# Altium PCB LD-Shoushi-V1.7.pcbdoc
Units mil, origin at the board's own origin, x right, y up, seen from the top; angles counter-clockwise.
Board outline 1576.8 x 1131.4 mil, 2 copper layers (Top Layer, Bottom Layer), stack 39.335 mil thick; 53 components, 37 nets, 241 pads, 35 vias.
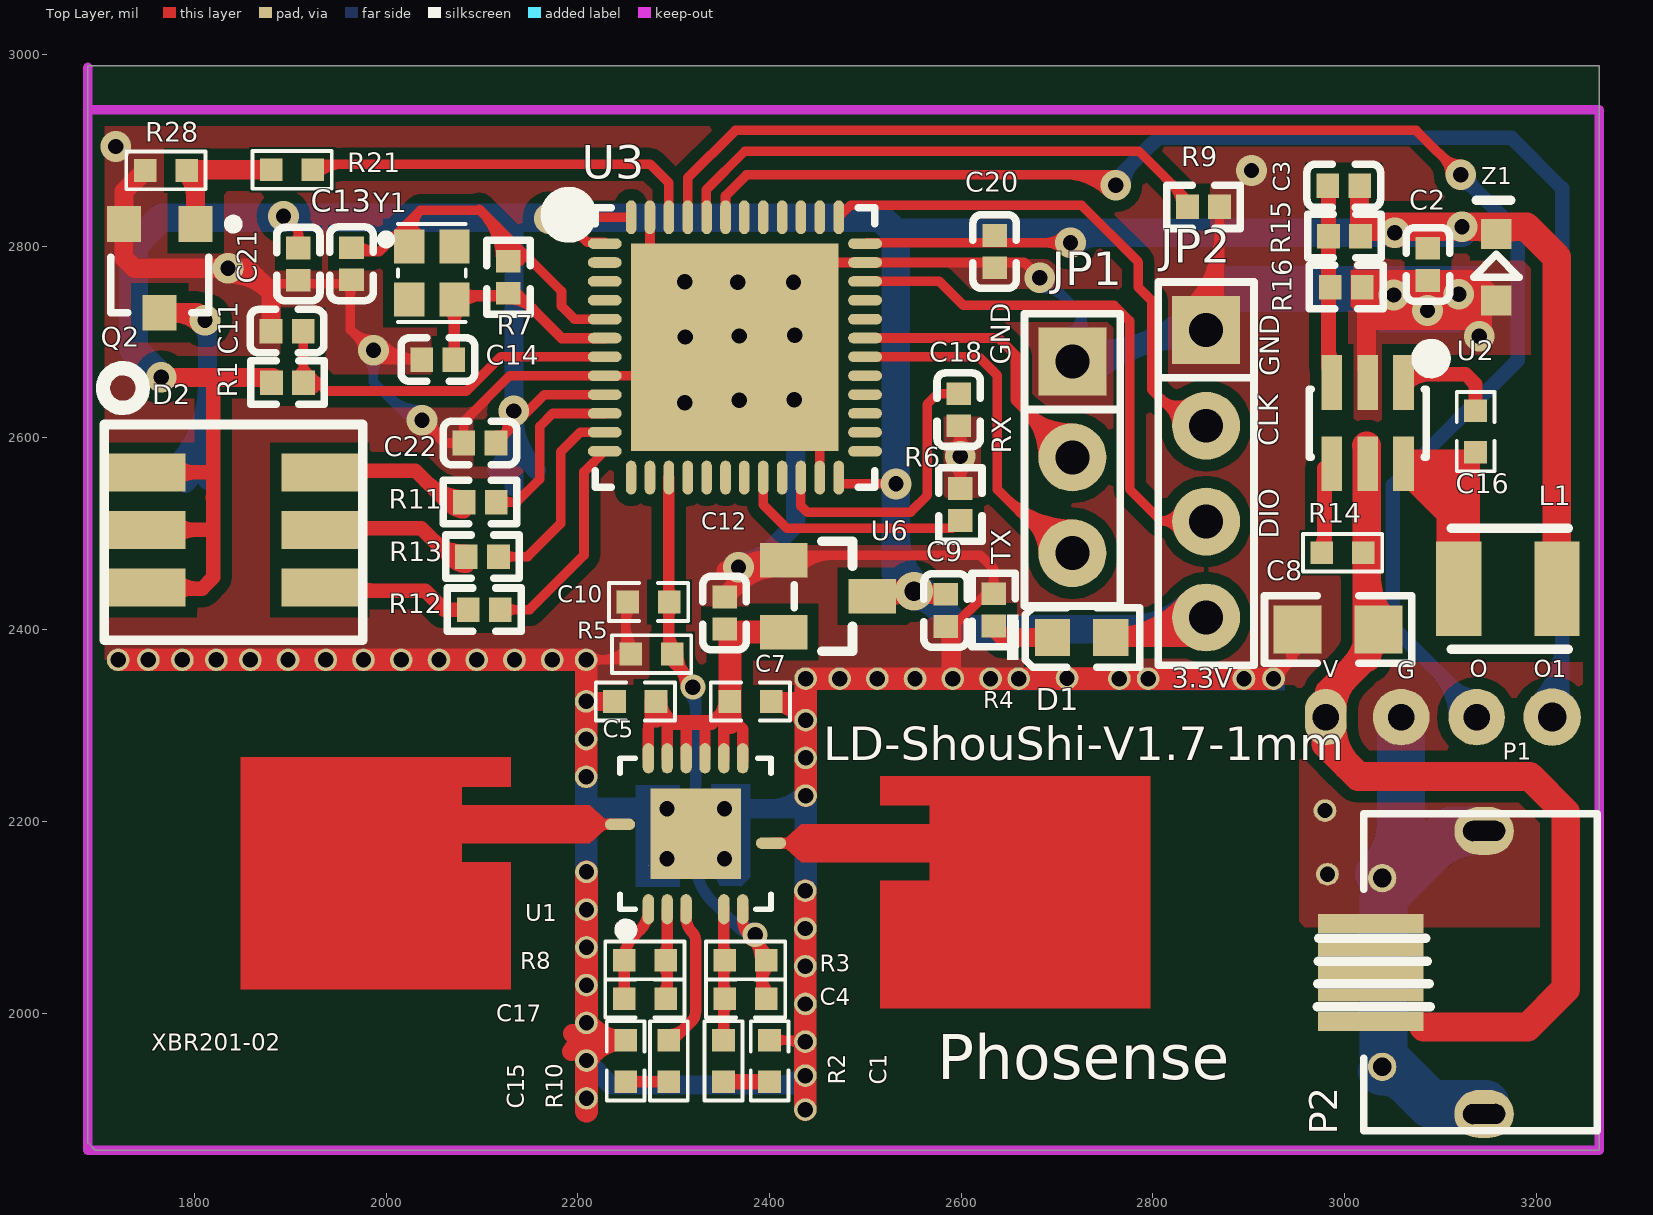
[diagram p0: Top Layer view]
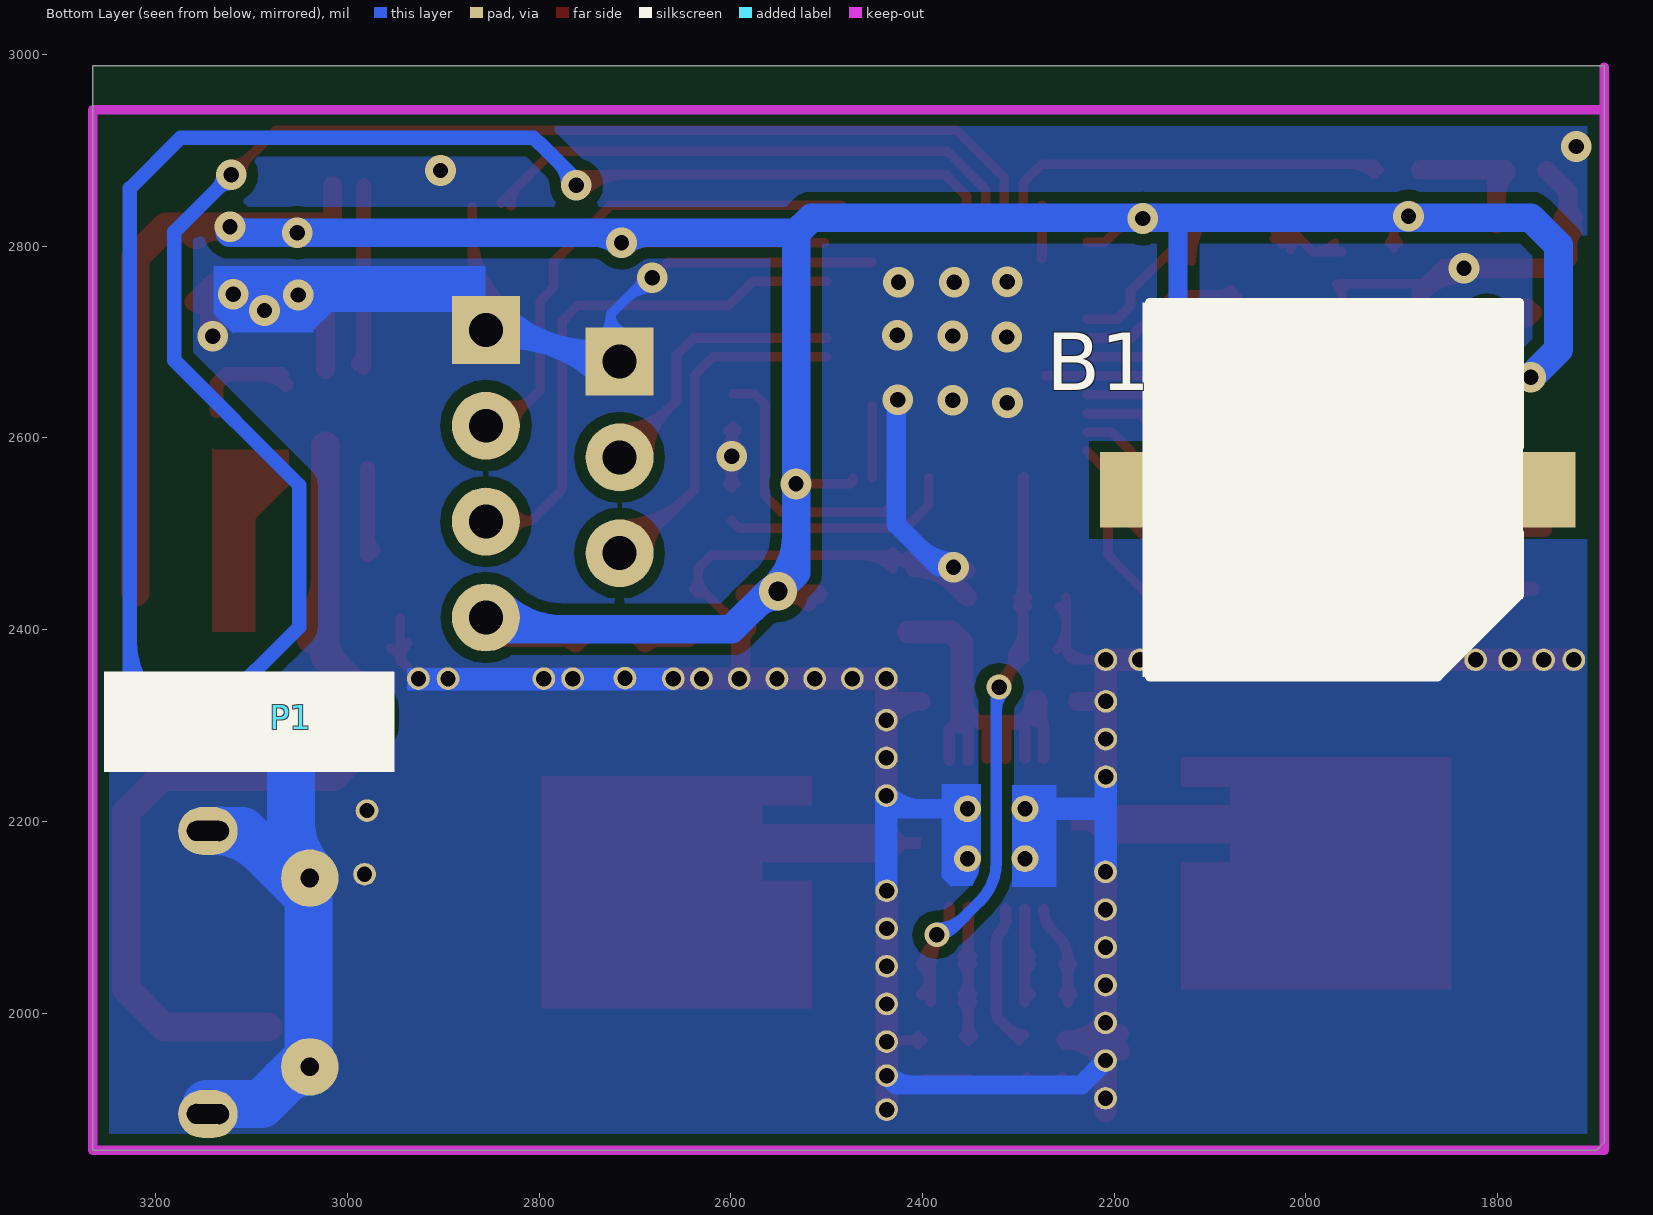
[diagram p1: Bottom Layer view, seen from below]

## Layer stack, top to bottom
Top Layer: signal copper 1.4
Dielectric: core 36.5354, FR-4, Dk 4.8
Bottom Layer: signal copper 1.4

## Board outline
1688.9,2988.1 3265.7,2988.1 3265.7,1856.7 1697.1,1856.7 1688.9,1864.9 1688.9,2986.8

## Design rules (kind name [scope] priority, off if disabled: settings)
Clearance [All] p1: gap=7
ComponentClearance [All] p1: gap=10 collisioncheckmode=3 verticalgap=10
PolygonConnect [All] p1: connectstyle=Direct reliefconductorwidth=10 reliefentries=4 polygonreliefangle="90 Angle"
RoutingVias [All] p1: holewidth=28 width=50 viastyle="Through Hole" minholewidth=15 minwidth=30 maxholewidth=28 maxwidth=50
SolderMaskExpansion [All] p1: expansion=4
TestPointUsage FabricationTestPointUsage [All] p1: valid=0 allowmultiple=FALSE
Testpoint FabricationTestpoint [(IsPad And (OnTopLayer Or OnBottomLayer))] p1: side=3 testpointundercomponent=TRUE minsize=40 maxsize=100 preferedsize=60 minholesize=0 maxholesize=40 preferedholesize=32 testpointgrid=1 style=297 order=0-112345678
Width [All] p1: maxlimit=60 minlimit=10 preferedwidth=10
18 further rules are at their usual default settings.

## Components (designator, comment, footprint, x,y, rotation, side; value= is the part's Value field where it differs from the comment)
B1 "BEEP-C255327" C255327-Beep 1777.7,2545.9 r0 bottom
C1 "4.7uF" C0402 2400,1950 r90 top
C2 "10uF" LC-0402_C#1 3086.9,2781 r90 top (schematic designator C18)
C3 "22pF" LC-0402_C#1 2999.1,2863 r0 top (schematic designator C16)
C4 "1nF" C0402 2375,2015 r180 top
C5 "0.5pF" C0402 2260,2325 r180 top
C7 "100nF" C0402 2380,2325 r0 top (schematic designator C5)
C8 "10uF/16V" C0805 2993.2,2400.1 r180 top
C9 "10uF" LC-0402_C#1 2583.7,2420 r90 top
C10 "100nF" C0402 2273.9,2428.8 r180 top (schematic designator C20)
C11 "100nF" LC-0402_C#1 1896.7,2711.4 r0 top
C12 "10uF" LC-0402_C#1 2353.1,2417.3 r270 top
C13 "22pF" LC-0402_C#1 1963.9,2781.7 r90 top
C14 "22pF" LC-0402_C#1 2054,2681.7 r0 top
C15 "1nF" C0402 2250,1950 r270 top
C16 "100nF" C0402 3136.6,2606.6 r90 top
C17 "1nF" C0402 2270,2015 r180 top
C18 "2.2UF" LC-0402_C#1 2597.4,2629.4 r270 top
C20 "10uF/6.3V" LC-0402_C#2 2634.9,2794.4 r90 top
C21 "0.1uF/50V" LC-0402_C#2 1908.4,2781.4 r90 top
C22 "0.1uF/50V" LC-0402_C#2 2097.9,2594.7 r0 top
D1 "红灯" LC-0603_LED_S1 2725.7,2391.9 r0 top
D2 "led三色共阴极灯" 三色灯 1845.8,2509 r0 top
JP1 "PH2.0-3P" 1X3-2.54 2716,2679.7 r270 top
JP2 "SWD" SIP4-2.54 2933.5,2791.7 r270 top
L1 "CSME0315D-100M-LRH" PRS3015 3115.2,2442.6 r0 top
P1 "PH2.0-3P" PH2.0-3P 2980.3,2308.7 r0 bottom
P2 "MINIUSB" miniusb 3027.4,2042.3 r0 top
Q2 "8050" SOT-23#1 1763.8,2781.8 r180 top
R1 "4.7KΩ" LC-0402_R 1897.1,2657.7 r180 top
R2 "2k" R0402 2352,1950 r90 top
R3 "1M" R0402 2375,2055 r180 top
R4 "1KΩ" LC-0402_R 2633.9,2420.5 r270 top (schematic designator R15)
R5 "47k" R0402 2276.9,2374.5 r180 top
R6 "10KΩ" LC-0402_R 2599.03,2530.53 r270 top
R7 "10MΩ" LC-0402_R 2127.6,2767.6 r270 top
R8 "10k" R0402 2270,2055 r180 top
R9 "10KΩ" LC-0402_R 2852.8,2841.1 r180 top
R10 "10k" R0402 2295,1950 r270 top
R11 "200Ω" LC-0402_R 2098.11,2533.06 r0 top (schematic designator R7)
R12 "200Ω" LC-0402_R 2102.41,2420.76 r0 top (schematic designator R7)
R13 "200Ω" LC-0402_R 2100.51,2476.06 r0 top (schematic designator R7)
R14 "47k" R0402 2997.9,2480.2 r0 top
R15 "100KΩ" LC-0402_R 2999.9,2810.6 r0 top
R16 "22.1KΩ" LC-0402_R 3001.7,2757.3 r0 top
R21 "2K" R0402 1902,2879.7 r180 top
R28 "2K" R0402 1770.3,2879 r0 top
U1 "XBR816" QFN24-1 2322.83,2187.01 r90 top
U2 "SY8120B1ABC" SOT23-6 3024.1,2615.5 r0 top
U3 "STM32F401CCU6" UFQFPN-48_L7.0-W7.0-P0.50-BL-EP 2363.9,2694.4 r270 top
U6 "ME6216A12M3G" SOT-23#2 2414.8,2472.2 r180 top
Y1 "25MHZ" OSC-SMD_4P-L2.0-W1.6-BL 2047.7,2772.1 r270 top
Z1 "ESD5Z5.0T1G" SOD323 3158.3,2824.6 r270 top

## Footprints (in the part's own frame and the unit in brackets; to place one, negate y for a bottom-side part, rotate by r counter-clockwise, add the part's x,y. Pads: shape width x height; smd on the part's side, far side on the other; paste and mask are expansions set on the pad)
1X3-2.54 [mm] "1X3-2.54"
  rect 1.8x1.8 hole 0.9: 1(0,0)
  round 1.8 hole 0.9: 2(2.54,0) 3(5.08,0)
  silkscreen extent -1.27,-1.27 6.48,1.27
C0402 [mm]
  rect 0.6x0.6 smd: 1(-0.55,0) 2(0.55,0)
  silkscreen extent -1.05,-0.5 1.05,0.5, body extent -0.5,-0.3 0.5,0.3, height 0.2
C0805 [mil]
  rect 50x50 smd: 1(-42.28,0) 2(42.28,0)
  silkscreen extent -77,-35 77,35, body extent -39,-24 39,24, height 47
C255327-Beep [mm] "C255327-Beep"
  rect 3x2 smd: 1(9.6,0) 2(0,0)
  silkscreen extent 0,-4.95 9.78,4.95
LC-0402_C#1 [mm]
  rect 0.6x0.65 smd mask+0.051: 1(-0.425,0) 2(0.425,0)
  silkscreen extent -0.97,-0.58 0.97,0.58, body extent -0.48,-0.3 0.52,0.3, height 0.2
LC-0402_C#2 [mm]
  rect 0.6x0.65 smd: 1(-0.425,0) 2(0.425,0)
  silkscreen extent -0.97,-0.58 0.97,0.58, body extent -0.48,-0.3 0.52,0.3, height 0.2
LC-0402_R [mm]
  rect 0.6x0.65 smd mask+0.051: 1(-0.425,0) 2(0.425,0)
  silkscreen extent -0.97,-0.58 0.97,0.58, body extent -0.57,-0.27 0.58,0.28, height 0.41
LC-0603_LED_S1 [mm]
  rect 0.93x0.98 smd: A(0.77,0) K(-0.77,0)
  silkscreen extent -1.97,-0.79 1.54,0.79, body extent -0.8,-0.4 0.8,0.4, height 0.6
miniusb [mm]
  rect 2.8x0.508 smd: 1(0,-1.295) 5(0,1.295)
  rect 2.8x0.35 smd: 2(0,-0.6) 3(0,0) 4(0,0.6)
  round 0.75 / inner round 0.75 / far side round 1.524 hole 0.5: 6(0.3,2.5) 9(0.3,-2.5)
  oval 1.575x1.27 hole 0.533 slot 1.118 at 0.5 deg: 7(3,3.75) 8(3,-3.75)
  silkscreen extent -0.19,-4.2 6,4.2
OSC-SMD_4P-L2.0-W1.6-BL [mm]
  rect 0.9x0.8 smd: 1(-0.7,-0.6) 2(0.7,-0.6) 3(0.7,0.6) 4(-0.7,0.6)
  silkscreen extent -1.3,-1.37 1.3,0.9
PH2.0-3P [mm]
  oval 1.1x1.5 hole 0.7: 1(0,0)
  round 1.5 hole 0.7: 2(2,0) 3(4,0)
  body extent -0.25,-0.25 4.25,0.25, height 5.5
PRS3015 [mm]
  rect 1.2x2.5 smd: 1(0.1,0) 2(2.7,0)
  silkscreen extent -0.1,-1.6 3,1.6, body extent -0.1,-1.5 2.9,1.5, height 1.5
QFN24-1 [mm] "QFN24"
  oval 0.8x0.3 smd: 1(-2,1.25) 2(-2,0.75) 3(-2,0.25) 5(-2,-0.75) 6(-2,-1.25) 13(2,-1.25) 14(2,-0.75) 15(2,-0.25) 16(2,0.25) 17(2,0.75) 18(2,1.25)
  oval 0.3x0.8 smd: 9(-0.25,-2) 21(0.25,2)
  rect 2.4x2.4 smd: 25(0,0)
  silkscreen extent -2.7,-2 2,2, body extent -2,-2 2,2, height 1
R0402 [mm]
  rect 0.6x0.6 smd: 1(-0.55,0) 2(0.55,0)
  silkscreen extent -1.05,-0.5 1.05,0.5, body extent -0.49,-0.25 0.51,0.25, height 0.35
SIP4-2.54 [mm]
  rect 1.8x1.8 hole 0.9: 1(2.007,-1.981)
  round 1.8 hole 0.9: 2(4.547,-1.981) 3(7.087,-1.981) 4(9.627,-1.981)
  silkscreen extent 0.74,-3.25 10.9,-0.71
SOD323 [mm]
  rect 0.8x0.8 smd: A(2.06,0) K(0.3,0)
  silkscreen extent 0.84,-0.6 1.44,0.6, body extent -0.17,-0.62 2.53,0.63, height 1.1
SOT23-6 [mm] "SOT-23/SC-74A; 5 Leads; Body 3.1 x 3 mm, inc. leads (LxW max)"
  rect 0.55x1.45 smd: 1(0.95,1.075) 2(0,1.075) 3(-0.95,1.075) 4(-0.95,-1.075) 5(0,-1.075) 6(0.95,-1.075)
  silkscreen extent -1.55,-0.9 1.7,1.8, body extent -1.4,-1.19 1.4,1.23, height 1.08
SOT-23#1 [mm]
  rect 0.9x0.95 smd: 1(-0.95,-1.048) 2(0.95,-1.048) 3(0,1.302)
  silkscreen extent -2.07,-1.17 1.3,1.3
SOT-23#2 [mm]
  rect 1.25x0.914 smd: 1(0,0) 2(0,1.9) 3(-2.348,0.95)
  silkscreen extent -1.82,-0.51 -0.27,2.41, body extent -2.67,-0.55 0.33,2.45, height 1.3
UFQFPN-48_L7.0-W7.0-P0.50-BL-EP [mm]
  oval 0.28x0.896 smd: 1(-2.751,-3.449) 2(-2.25,-3.449) 3(-1.75,-3.449) 4(-1.25,-3.449) 5(-0.749,-3.449) 6(-0.249,-3.449) 7(0.249,-3.449) 8(0.749,-3.449) 9(1.25,-3.449) 10(1.75,-3.449) 11(2.25,-3.449) 12(2.751,-3.449) 25(2.751,3.449) 26(2.25,3.449) 27(1.75,3.449) 28(1.25,3.449) 29(0.749,3.449) 30(0.249,3.449) 31(-0.249,3.449) 32(-0.749,3.449) 33(-1.25,3.449) 34(-1.75,3.449) 35(-2.25,3.449) 36(-2.751,3.449)
  oval 0.896x0.28 smd: 13(3.449,-2.751) 14(3.449,-2.25) 15(3.449,-1.75) 16(3.449,-1.25) 17(3.449,-0.749) 18(3.449,-0.249) 19(3.449,0.249) 20(3.449,0.749) 21(3.449,1.25) 22(3.449,1.75) 23(3.449,2.25) 24(3.449,2.751) 37(-3.449,2.751) 38(-3.449,2.25) 39(-3.449,1.75) 40(-3.449,1.25) 41(-3.449,0.749) 42(-3.449,0.249) 43(-3.449,-0.249) 44(-3.449,-0.749) 45(-3.449,-1.25) 46(-3.449,-1.75) 47(-3.449,-2.25) 48(-3.449,-2.751)
  rect 5.5x5.5 smd: 49(0,0)
  silkscreen extent -3.7,-4.5 3.7,3.7
三色灯 [mil]
  rect 80x39.37 smd: 1(-95,55) 2(-95,-5) 3(-95,-65) 4(85,55) 5(85,-5) 6(85,-65)
  silkscreen extent -140,-120 130,105

## Part data
B1: library part BEEP
C1 C4 C5 C7 C8 C10 C15 C16 C17: library part Cap, "Capacitor"
C2 C9 C12 C20 C21 C22: library part "0402 10uF (106) 20% 6.3V", "贴片电容"
C3 C13 C14: library part "0402 22pF (220) 5% 50V", "贴片电容"
C11: library part "0402 100nF (104) 10% 16V", "贴片电容"
C18: library part "0402 2.2nF (222) 10% 50V", "贴片电容"
D1: library part "0603 红灯", "发光二极管"
JP1 P1: library part "Header 3", "Header, 3-Pin"
JP2: library part "Header 4", "4P接插件"
L1: library part Inductor, "Inductor"
P2: library part MINIUSB-M
Q2: library part 2N3904, "NPN General Purpose Amplifier"
R1: library part "0402 4.7KΩ (4701) 1%", "贴片电阻"
R2 R3 R5 R8 R10 R14 R21 R28: library part Res2, "Resistor"
R4: library part "0402 1KΩ (1001) 1%", "贴片电阻"
R6 R9: library part "0402 10KΩ (1002) 1%", "贴片电阻"
R7: library part "0402 10MΩ (1005) 1%", "贴片电阻"
R11 R12 R13: library part "0402 200Ω (2000) 1%", "贴片电阻"
R15: library part "0402 100KΩ (1003) 1%", "贴片电阻"
R16: library part "0402 22KΩ (2202) 1%", "贴片电阻"
U1: library part XBR1000_24_1
U2: library part H9108
U3: "ARM Cortex-M4 32-bit MCU+FPU, 105 DMIPS, 256 kB Flash, 64 kB Internal RAM, 36 I/Os, 48-pin UFQFPN, -40 to 85 degC, Tray"
U6: library part SSP6206
Y1: library part "SMD-3225_4P  25MHZ 12PF 10PPM", "贴片晶振"
Z1: library part "D Zener", "Zener Diode"

## Free pads (board coordinates)
  round 23.62 hole 16: 1(1720.47,2368.5) 1(1752.01,2368.5) 1(1787.44,2368.5) 1(1822.89,2368.5) 1(1858.32,2368.5) 1(1897.69,2368.5) 1(1937.06,2368.5) 1(1976.43,2368.5) 1(2015.8,2368.5) 1(2055.17,2368.5) 1(2094.54,2368.5) 1(2133.91,2368.5) 1(2173.28,2368.5) 1(2208.72,2246.46) 1(2208.72,2285.83) 1(2208.72,2325.2) 1(2208.72,2368.5) 1(2209.03,1911.02) 1(2209.03,1950.39) 1(2209.03,1989.76) 1(2209.03,2029.13) 1(2209.03,2068.5) 1(2209.03,2107.87) 1(2209.03,2147.24) 1(2437.38,1899.21) 1(2437.38,1934.65) 1(2437.38,1970.08) 1(2437.38,2009.45) 1(2437.38,2048.82) 1(2437.38,2088.19) 1(2437.38,2127.56) 1(2437.69,2348.82) 1(2437.69,2226.77) 1(2437.69,2266.14) 1(2437.69,2305.51) 1(2473.12,2348.81) 1(2512.49,2348.81) 1(2551.86,2348.81) 1(2591.23,2348.81) 1(2630.6,2348.81) 1(2660,2348.82) 1(2710.4,2349.4) 1(2765,2348.82) 1(2795,2348.82) 1(2895,2348.82) 1(2925.88,2348.82) 1(2979.5,2211.2) 1(2982.1,2144.8)
  round 28 hole 16: 1(2293.04,2161.03) 1(2293.04,2213.03) 1(2353,2161.03) 1(2353,2213.03)
  round 60 hole 30: 1(3216.52,2308.7)

## Via types
v1: diameter 32, hole 16, Top Layer to Bottom Layer, 32 vias
v2: diameter 26, hole 16, Top Layer to Bottom Layer, tented both sides, 2 vias
v3: diameter 40, hole 20, Top Layer to Bottom Layer, 1 vias

## Nets (pads, with @x,y where several pads share a name; then routed paths per layer and width w, separated by ;. In a path a pad name is that pad's centre, name@x,y a point inside that pad or via, vN(x,y) a via of type N, cw(c..) or ccw(c..) an arc to the next point about the centre after c; other vN are vias at no path point)
1.2V: C5.1 C7.1 C12.2 U1.13 U1.14 U1.15 U1.16 U1.17 U1.18 U6.2 | length 559.3
  Top Layer w11.8: U1.18 2273.62,2295.19 cw(c2318.11,2295.19) 2274.32,2303.03 cw(c2318.11,2295.19) 2281.65,2320.69 cw(c2318.11,2295.19) 2281.94,2321.09 cw(c2318.11,2295.19) C5.1@2286.65,2326.65 ; C5.1@2281.65,2321.38 2300,2303.03 2293.31,2303.03 U1.17 ; C5.1@2287.56,2325 ccw(c2310.58,2325) 2294.31,2308.73 ; U1.16 2312.99,2303.03 ; U1.15 2332.68,2303.03 ; 2339.38,2303.03 C7.1@2357.44,2321.09 ; 2346.13,2309.79 ccw(c2330.92,2325) C7.1@2352.44,2325 ; U1.14@2352.36,2263.39 2352.36,2303.03 ; 2365.32,2303.03 2372.05,2296.3 U1.13@2372.05,2263.39
  Top Layer w15.75: 2300,2303.03 2339.38,2303.03 ; 2352.36,2303.03 2362.2,2303.03
  Top Layer w24: 2281.65,2310 C5.1@2281.65,2324.79 ; 2358.6,2303.03 2358.6,2385.8 2370.2,2397.4 U6.2
3.3V: B1.1 C2.2 C3.2 C9.2 C20.2 C21.2 C22.2 D1.A D2.1 D2.2 D2.3 JP2.4 L1.2 R1.2 R15.2 U3.1 U3.9 U3.24 U3.36 U3.48 U6.3 Z1.K | length 5448.4
  Top Layer w10: v1(1892.9,2831.3) 1908.4,2815.8 C21.2 ; C21.2@1903.58,2802.95 ccw(c1891.96,2814.58) 1908.4,2814.58 ccw(c1924.84,2814.58) C21.2@1913.22,2802.95 ; C22.2 2165.13,2645.2 U3.9 ; C22.2@2114.63,2602.5 ccw(c2114.63,2621.31) 2127.94,2608.01 ; C22.2@2121.44,2595.68 cw(c2135.51,2595.68) C22.2@2125.56,2605.63 ; C22.2@2121.95,2602.02 ccw(c2110.64,2613.33) v1@2124.07,2622.02 ; 2130.69,2610.76 ccw(c2121.25,2620.2) v1@2132.46,2627.46 ; v1@2170.2,2827.9 cw(c2170.2,2789.76) 2197.17,2816.73 ; v1(2170.2,2828.9) 2185,2828.9 2209.9,2804 U3.1@2228.1,2804 ; v1@2171.5,2830.2 U3.48 ; v1@2177.98,2821.12 cw(c2199.89,2799.21) 2199.89,2830.2 ; v1@2177.98,2836.68 ccw(c2193.62,2852.32) 2193.62,2830.2 ; U3.24 2472.2,2554.4 2474.6,2552 v1(2532,2552) ; U3.36@2502,2803.7 v1(2714,2803.7) ; v1@2706.22,2795.92 ccw(c2687.44,2777.14) 2687.44,2803.7 ccw(c2687.44,2830.26) v1@2706.22,2811.48
  Top Layer w15: D2.2 1814.8,2504 ; D2.1 1817.1,2564 ; D2.3@1764,2442.7 1808,2442.7 1819.8,2454.5 1819.8,2663.1 ; D2.3@1779.73,2435.38 cw(c1797.39,2417.72) 1797.39,2442.7 ; D2.3@1779.73,2452.62 ccw(c1803.67,2476.56) 1803.67,2442.7 ; D2.2@1779.73,2495.38 cw(c1800.53,2474.58) 1800.53,2504 cw(c1800.53,2533.42) D2.2@1779.73,2512.62 ; D2.1@1779.73,2555.38 cw(c1800.53,2534.58) 1800.53,2564 cw(c1800.53,2593.42) D2.1@1779.73,2572.62 ; 1819.2,2537.8 1819.8,2538.4
  Top Layer w20: v1@1765.5,2663.1 R1.2@1881.87,2663.1 ; 1865.34,2663.1 cw(c1865.34,2643.65) R1.2@1879.09,2657.4 ; U6.3@2509.26,2436.83 C9.2@2585.3,2436.83 ; U6.3@2519.01,2436.83 ccw(c2519.01,2471.79) v3@2543.73,2447.07 ; U6.3@2519.49,2429.14 cw(c2538.06,2410.57) v3@2538.06,2436.83 ; D1.A@2761.89,2386.03 cw(c2776.07,2371.84) 2776.07,2391.9 cw(c2776.07,2411.96) D1.A@2761.89,2397.77 ; 2799.05,2391.9 ccw(c2799.05,2460.31) JP2.4@2851.35,2416.2 ; JP2.4@2834.7,2391.9 D1.A ccw(c2756.02,2496.61) JP2.4@2836.06,2429.1 ; R15.2@3015.53,2813.4 C3.2@3015.53,2863
  Top Layer w30: R15.2@3023.9,2820.2 3189.5,2820.2 3221.2,2788.5 L1.2@3221.2,2439.1 ; 3034.92,2820.2 cw(c3034.92,2796.62) v1@3051.59,2813.29 ; v1@3053.01,2813.29 cw(c3069.68,2796.62) 3069.68,2820.2 ; 3138.6,2820.2 cw(c3138.6,2793.09) Z1.K@3157.77,2812.26 ; Z1.K@3158.83,2812.26 cw(c3178,2793.09) 3178,2820.2
  Bottom Layer w20: B1.1@2115.2,2566.67 ccw(c2071.5,2610.37) 2133.3,2610.37 ; B1.1@2133.3,2549 2133.3,2830.2 ; v1@2133.3,2623.25 ccw(c2213.31,2623.25) B1.1@2156.74,2566.67
  Bottom Layer w30: v1@1763.8,2664.9 1736.5,2692.2 1736.5,2801 1765.3,2829.8 2515.8,2829.8 2531.6,2814 ; 2531.6,2498.42 ccw(c2609.22,2498.42) v3@2554.34,2443.54 ; v1@2531.6,2545.8 v1(2532,2552) ; v3@2550.8,2435 cw(c2550.8,2401.68) 2574.36,2425.24 ; 2686.72,2814 cw(c2686.72,2776.42) v1@2713.29,2802.99 ; v1@2714.71,2802.99 cw(c2741.28,2776.42) 2741.28,2814 ; 2776.23,2400.3 ccw(c2776.23,2491.97) JP2.4@2841.05,2427.15 ; JP2.4 2843.1,2400.3 2599.3,2400.3 2559.6,2440 v3(2550.8,2440) 2531.6,2459.2 2531.6,2814 ; 3105.02,2814 ccw(c3105.02,2837.58) v1@3121.69,2820.91 ; v1@3122.4,2814 2531.6,2814
  other v1: 2133.3,2628 1765.3,2663.3 3052.3,2814 3122.4,2820.2
5~16V: C8.1 P1.1 P2.1 R14.2 U2.5 | length 1180.4
  Top Layer w30: P1.1 2980.3,2280.7 3014.2,2246.8 3193,2246.8 3230.6,2209.2 3230.6,2025.1 3190.9,1985.4 P2.1@3082.5,1985.4 ; P1.1@2984.3,2297.1 2984.3,2334.6 3023,2373.3 3023,2591.8 U2.5@3022.9,2591.9 ; P1.1@2986.95,2300.58 ccw(c3045.72,2298.45) 3004.13,2256.87 ; P1.1@2986.95,2316.57 cw(c3036.88,2316.57) 3001.58,2351.88 ; 3008.28,2358.58 ccw(c2966.75,2400.1) C8.1@3025.48,2400.1 ; 3023,2370.54 cw(c3043.68,2370.54) C8.1@3038.15,2390.46 ; 3023,2454.36 ccw(c3089.74,2454.36) C8.1@3042.55,2407.17
AD: C4.1 C10.1 R3.1 R5.1 U1.6 U3.15 | length 893.5
  Top Layer w11.8: C10.1@2291.37,2424.62 cw(c2282.62,2415.87) 2295,2415.87 ; C10.1@2291.37,2432.98 ccw(c2282.62,2441.73) 2295,2441.73 ; 2295,2397.35 ccw(c2321.4,2397.35) R5.1@2302.73,2378.68 ; 2295,2413.19 cw(c2311.16,2413.19) C10.1@2299.73,2424.62 ; 2295,2444.41 ccw(c2311.16,2444.41) C10.1@2299.73,2432.98 ; U3.15 2295,2370.1 v2@2320,2345.1 ; 2304.27,2360.83 cw(c2283.45,2340) v2@2312.9,2340 ; R5.1@2304.46,2374.5 ccw(c2337.94,2374.5) v2@2314.27,2350.83 ; U1.6@2372.05,2094.03 U1.6@2372.05,2110.24 ; U1.6 2372.05,2096.02 ccw(c2392.37,2096.02) 2378,2081.65 2392.17,2067.49 cw(c2381.33,2056.65) 2396.65,2056.65 2391.65,2051.65 C4.1@2391.65,2011.97 ; v2@2380.91,2078.75 cw(c2357.16,2055) R3.1@2390.74,2055 ; v2@2388.17,2071.49 cw(c2378.72,2062.05) R3.1@2391.15,2057.16 ; 2391.65,2028.66 cw(c2422.99,2028.66) R3.1@2400.83,2050.82 ; 2391.65,2041.34 ccw(c2422.99,2041.34) C4.1@2400.83,2019.18
  Bottom Layer w11.8: v2@2314.98,2334.98 cw(c2295.62,2315.62) 2323,2315.62 ; v2@2323,2340 2323,2157.65 ccw(c2380.94,2157.65) 2339.97,2116.68 2367.93,2088.72 ccw(c2385,2105.8) v2(2385,2081.65) ; 2355.81,2100.85 ccw(c2385,2130.04) v2@2385,2088.75
  other v2: 2320,2340
BLUE_LED: R11.2 U3.10 | length 209.6
  Top Layer w10: R11.2 2136.26,2533.06 2160.3,2557.1 2160.3,2612.06 2173.74,2625.5 U3.10 ; R11.2@2119.66,2528.25 cw(c2131.29,2516.62) 2131.29,2533.06 cw(c2131.29,2549.51) R11.2@2119.66,2537.88
BOOT0: R9.2 U3.44 | length 598.3
  Top Layer w10: U3.44@2334.1,2830.2 2334.1,2859 2374.2,2899.1 2785.3,2899.1 R9.2@2839.68,2844.72 ; 2820.02,2864.38 cw(c2797.73,2842.08) R9.2@2829.26,2842.08
BOOT1: R6.2 U3.20 | length 247.5
  Top Layer w10: U3.20 2393.4,2530.4 2418.2,2505.6 2590.83,2505.6 R6.2
BUZZER: R21.1 U3.46 | length 445.4
  Top Layer w10: R21.1 1929.25,2885.3 2275.7,2885.3 2295,2866 U3.46 ; R21.1@1928.47,2874.88 cw(c1953.62,2849.74) 1953.62,2885.3
GND: C1.2 C2.1 C5.2 C7.2 C8.2 C9.1 C10.2 C11.1 C12.1 C13.1 C14.1 C15.1 C18.2 C20.1 C21.1 C22.1 JP1.1 JP2.1 P1.2 P2.5 P2.6 P2.7 P2.8 P2.9 pad.1@1720.47,2368.5 pad.1@1752.01,2368.5 pad.1@1787.44,2368.5 pad.1@1822.89,2368.5 pad.1@1858.32,2368.5 pad.1@1897.69,2368.5 pad.1@1937.06,2368.5 pad.1@1976.43,2368.5 pad.1@2015.8,2368.5 pad.1@2055.17,2368.5 pad.1@2094.54,2368.5 pad.1@2133.91,2368.5 pad.1@2173.28,2368.5 pad.1@2208.72,2246.46 pad.1@2208.72,2285.83 pad.1@2208.72,2325.2 pad.1@2208.72,2368.5 pad.1@2209.03,1911.02 pad.1@2209.03,1950.39 pad.1@2209.03,1989.76 pad.1@2209.03,2029.13 pad.1@2209.03,2068.5 pad.1@2209.03,2107.87 pad.1@2209.03,2147.24 pad.1@2293.04,2161.03 pad.1@2293.04,2213.03 pad.1@2353,2161.03 pad.1@2353,2213.03 pad.1@2437.38,1899.21 pad.1@2437.38,1934.65 pad.1@2437.38,1970.08 pad.1@2437.38,2009.45 pad.1@2437.38,2048.82 pad.1@2437.38,2088.19 pad.1@2437.38,2127.56 pad.1@2437.69,2226.77 pad.1@2437.69,2266.14 pad.1@2437.69,2305.51 pad.1@2437.69,2348.82 pad.1@2473.12,2348.81 pad.1@2512.49,2348.81 pad.1@2551.86,2348.81 pad.1@2591.23,2348.81 pad.1@2630.6,2348.81 pad.1@2660,2348.82 pad.1@2710.4,2349.4 pad.1@2765,2348.82 pad.1@2795,2348.82 pad.1@2895,2348.82 pad.1@2925.88,2348.82 pad.1@2979.5,2211.2 pad.1@2982.1,2144.8 Q2.2 R4.1 R5.2 R6.1 R9.1 R16.2 R28.1 U1.25 U2.2 U3.8 U3.23 U3.35 U3.47 U3.49 U6.1 Z1.A | length 9125
  Top Layer w10: 1872.03,2760.97 1962.6,2760.97 1962.6,2713 1993.9,2681.7 C14.1 ; C13.1@1958.1,2760.15 cw(c1947.23,2749.29) 1962.6,2749.29 ; 1962.6,2747.76 cw(c1980.12,2747.76) C13.1@1967.73,2760.15 ; 1963.9,2711.7 ccw(c1986.36,2734.15) v1@1986.69,2702.4 ; 1969.86,2705.74 cw(c1955.52,2691.4) v1@1975.8,2691.4 ; v1@1987.51,2692.11 ccw(c2012.63,2717.23) 2012.63,2681.7 ; v1@1994.58,2699.18 ccw(c2036.77,2741.37) C14.1@2036.77,2681.7 ; C14.1@2032.45,2676.88 ccw(c2020.82,2665.26) 2020.82,2681.7 ccw(c2020.82,2698.14) C14.1@2032.45,2686.52 ; v1@2037.4,2607.3 cw(c2037.4,2580.74) 2056.18,2599.52 cw(c2074.96,2618.3) v1@2048.4,2618.3 ; v1(2037.4,2618.3) 2061,2594.7 C22.1 2081.17,2617.07 2129,2664.9 U3.49@2272,2664.9 ; C22.1@2076.35,2589.88 ccw(c2064.72,2578.26) 2064.72,2594.7 ccw(c2064.72,2611.14) C22.1@2076.35,2599.52 ; pad.1@2208.72,2368.5 2240.5,2368.5 ; pad.1@2213.53,2363.69 cw(c2225.16,2352.06) 2225.16,2368.5 cw(c2225.16,2384.95) pad.1@2213.53,2373.32 ; 2224.33,2368.5 ccw(c2224.33,2405.42) R5.2@2250.43,2379.32 ; R5.2@2248.5,2375.45 cw(c2240.5,2376.58) 2240.5,2368.5 ; 2250,2403.61 ccw(c2284.36,2403.61) R5.2@2260.06,2379.32 ; 2250,2406.93 cw(c2274.11,2406.93) C10.2@2257.06,2423.98 ; C10.2@2250,2433.6 2250,2378 2240.5,2368.5 ; U3.49@2275.3,2786.9 U3.47@2275.3,2842.8 ; C1.2 pad.1@2435.8,1971.65 ; C1.2@2404.82,1966.84 cw(c2416.44,1955.21) 2416.44,1971.65 cw(c2416.44,1988.1) C1.2@2404.82,1976.47 ; 2417.13,1971.65 cw(c2417.13,1949.83) pad.1@2432.56,1965.26 ; U6.1@2423.53,2470.08 cw(c2441.93,2451.68) 2441.93,2477.7 ; 2424.74,1971.65 ccw(c2424.74,1982.72) pad.1@2432.56,1974.89 ; U6.1@2427,2477.7 2619.8,2477.7 2633.9,2463.6 R4.1 2625.79,2437.23 C9.1@2590.54,2401.99 ; U6.1@2430.6,2463.01 cw(c2466.07,2427.54) 2466.07,2477.7 ; U6.1@2430.6,2481.39 ccw(c2439.51,2490.31) 2439.51,2477.7 ; U3.23 U3.49@2452.5,2633.8 ; U3.49@2453.1,2783 2665.9,2783 v1(2681.8,2767.1) ; v1@2591.25,2572.92 cw(c2572.48,2554.14) 2599.03,2554.14 cw(c2625.59,2554.14) v1@2606.81,2572.92 ; v1@2591.25,2588.48 ccw(c2572.48,2607.26) 2599.03,2607.26 ccw(c2625.59,2607.26) v1@2606.81,2588.48 ; C18.2@2593.57,2607.85 cw(c2580.38,2594.66) v1@2599.03,2594.66 ; R6.1@2594.22,2552.08 ccw(c2582.59,2563.71) 2599.03,2563.71 ccw(c2615.48,2563.71) R6.1@2603.85,2552.08 ; C18.2 2599.03,2611.04 R6.1 ; 2599.03,2597.79 cw(c2613.26,2597.79) C18.2@2603.2,2607.85 ; R4.1@2629.08,2442.05 ccw(c2617.46,2453.68) 2633.9,2453.68 ccw(c2650.34,2453.68) R4.1@2638.72,2442.05 ; JP2.1@2833.98,2734.22 ccw(c2748.15,2820.05) 2869.53,2820.05 ; JP2.1@2841.05,2727.15 ccw(c2772.29,2795.91) 2869.53,2795.91 ; JP2.1@2848.12,2720.08 ccw(c2796.44,2771.76) 2869.53,2771.76 ; JP2.1@2854.5,2713.1 2869.53,2728.13 R9.1 ; JP2.1@2855.19,2713.01 ccw(c2820.58,2747.62) JP2.1@2869.53,2747.62 ; 2869.53,2752.3 ccw(c2895.09,2752.3) JP2.1@2877.02,2734.22 ; pad.1@2925.88,2348.82 2944.72,2367.66 C8.2@2944.72,2412.3 ; pad.1@2925.88,2355.63 ccw(c2925.88,2372.07) 2937.51,2360.45 ccw(c2949.14,2348.82) pad.1@2932.69,2348.82 ; C8.2@2936.87,2385.87 cw(c2918.31,2367.08) 2944.72,2367.08 ; 2944.72,2367.07 cw(c2958.64,2367.07) C8.2@2955.47,2380.62
  Top Layer w20: Q2.2@1720.94,2816.62 cw(c1707.77,2803.45) 1726.4,2803.45 cw(c1745.03,2803.45) Q2.2@1731.85,2816.62 ; Q2.2@1720.94,2829.5 ccw(c1707.77,2842.67) 1726.4,2842.67 ccw(c1745.03,2842.67) Q2.2@1731.85,2829.5 ; R28.1 1726.4,2856.75 1726.4,2788 1737.4,2777 1855.2,2777 1880.07,2752.13 C11.1@1880.07,2717.7 ; v1@1835.1,2771 cw(c1835.1,2707.99) 1879.66,2752.54 ; v1@1837.71,2771.6 cw(c1848.21,2749.91) 1865.25,2766.95 ; 2193.48,1959.82 cw(c2214.48,1947.09) 2214.48,1971.65 ; 2194.72,1978.53 ccw(c2208.87,1989.64) 2208.87,1971.65 ; pad.1@2210.46,1990.88 ccw(c2250,2021.93) C15.1 ; pad.1@2210.58,1949.45 cw(c2250,1925.56) C15.1 ; 2212.38,1971.65 C15.1 ; pad.1@2213.76,2325 C5.2 ; C12.1 U6.1@2391.27,2472.2 ; v1@2354.85,2461.65 2362.86,2461.65 cw(c2350.86,2452.84) C12.1@2361.38,2442.32 ; 2365.64,2446.57 cw(c2408.19,2404.02) U6.1@2408.19,2464.2 ; v1@2371.03,2470.19 ccw(c2379.92,2483.54) U6.1@2391.27,2472.2 ; v1@2371.94,2460.96 cw(c2399.08,2433.82) U6.1@2399.08,2472.2 ; v1@2372.78,2462 cw(c2391.27,2450.34) U6.1@2391.27,2472.2 ; U6.1 U6.1@2391.27,2472.2 ; 2434.86,2325 C7.2 cw(c2401.66,2285.67) pad.1@2436.11,2304.64 ; C9.1@2583.4,2401.99 cw(c2568.44,2387.03) 2589.6,2387.03 ; pad.1@2589.6,2350.02 C9.1@2589.6,2403.37 ; 3018.85,2744.35 cw(c3033.21,2729.99) v1@3047.18,2744.74 ; U2.2@3022.9,2671.32 3022.9,2748.4 3032.7,2758.2 ; 3031.25,2756.75 cw(c3047.99,2740.01) v1@3056.09,2762.26 ; 3033.39,2758.89 cw(c3047.35,2744.93) v1@3060.92,2759.27 ; v1@3045.43,2747.87 ccw(c3032.7,2745.2) 3032.7,2758.2 ; v1@3055.54,2744.86 cw(c3087.75,2712.65) C2.1@3087.75,2758.2 ; 3067.19,2758.2 cw(c3067.19,2721.95) v1@3098.65,2739.95 ; v1@3074.72,2740.56 cw(c3107,2719.85) v1@3107,2758.2 ; v1@3081.29,2730.02 ccw(c3032.7,2702.22) 3032.7,2758.2 ; C2.1@3084.48,2758.2 cw(c3084.48,2715.38) v1@3114.76,2745.66 ; v1@3091.55,2729.76 cw(c3143.6,2696.36) Z1.A@3143.6,2758.2 ; v1@3108.93,2758.2 cw(c3108.93,2694.13) Z1.A@3154.24,2739.43 ; v1@3110.94,2761.35 cw(c3125.43,2740.76) Z1.A@3143.23,2758.56 ; v1@3116.44,2763.66 cw(c3122.9,2728.92) Z1.A@3147.89,2753.91 ; v1@3122.45,2744.99 cw(c3139.32,2721.03) Z1.A@3160.05,2741.75 ; v1@3124.21,2746.93 cw(c3143.6,2735.9) Z1.A@3143.6,2758.2 ; Z1.A Z1.A@3143.6,2758.2 ; 3032.7,2758.2 Z1.A@3143.6,2758.2
  Top Layer w23.62: pad.1@1720.47,2368.5 2208.72,2368.5 pad.1@2208.72,2246.46 ; 2209.03,1897.64 pad.1@2209.03,2147.24 ; pad.1@2437.38,1899.21 pad.1@2437.38,2127.56 ; pad.1@2437.69,2226.77 2437.69,2348.82 pad.1@2925.88,2348.82
  Bottom Layer w10: v1@1979.02,2683.62 cw(c1960.24,2664.84) 1986.8,2664.84 cw(c2013.36,2664.84) v1@1994.58,2683.62 ; v1(1986.8,2691.4) 1986.8,2658.4 2026.9,2618.3 v1(2037.4,2618.3) ; 2000.7,2644.5 ccw(c2037.4,2681.21) v1@2037.4,2629.3 ; 2017.77,2627.43 ccw(c2037.4,2647.06) v1@2037.4,2619.3 ; v1@2681.8,2756.1 cw(c2681.8,2715.78) 2710.31,2744.29 ; v1@2687.5,2767.1 2725.2,2729.4 ; v1@2692.8,2767.1 ccw(c2705.6,2767.1) 2696.55,2758.05 ; JP1.1@2709.23,2709.37 ccw(c2704.66,2729.4) 2725.2,2729.4 ; JP1.1@2711.45,2699.62 ccw(c2707.52,2716.86) 2725.2,2716.86 ; JP1.1@2716.31,2679.39 cw(c2760.74,2634.96) 2760.74,2697.8 ; JP1.1@2723.38,2672.32 cw(c2784.88,2610.82) 2784.88,2697.8 ; JP1.1@2725.2,2661.1 2725.2,2729.4 ; JP1.1@2725.2,2697.8 2840.6,2697.8 JP2.1 ; JP1.1@2730.45,2665.25 cw(c2809.03,2586.67) 2809.03,2697.8 ; JP1.1@2737.04,2701.69 cw(c2763.54,2729.4) 2725.2,2729.4 ; JP1.1@2737.52,2658.18 cw(c2833.17,2562.53) JP2.1@2833.17,2697.8 ; JP1.1@2746.06,2697.8 ccw(c2746.06,2822.14) JP2.1@2833.98,2734.22 ; 2770.2,2697.8 ccw(c2770.2,2798) JP2.1@2841.05,2727.15 ; 2794.34,2697.8 ccw(c2794.34,2773.86) JP2.1@2848.12,2720.08 ; 2818,2697.8 cw(c2818,2675.2) JP2.1@2833.98,2691.18 ; 2818.48,2697.8 ccw(c2818.48,2749.72) JP2.1@2855.19,2713.01
  Bottom Layer w20: pad.1@2209.03,1950.39 2234.43,1925 2427.73,1925 pad.1@2437.38,1934.65 ; pad.1@2293.04,2161.03 pad.1@2293.04,2213.03 ; pad.1@2352.04,2161.03 2352.04,2213.03 2435.66,2213.03 ; v1(2367.7,2465.2) 2382.7,2465.2 2427.3,2509.8 v1@2427.3,2639.9 ; v1@2367.7,2471.2 ccw(c2367.7,2521.9) 2403.55,2486.05 ; 2400.15,2213.03 ccw(c2400.15,2264.32) pad.1@2436.41,2228.05 ; 2409.72,1925 ccw(c2409.72,1962.3) pad.1@2436.1,1935.93 ; v1@2421.66,2635.66 cw(c2408.03,2622.03) 2427.3,2622.03
  Bottom Layer w23.62: pad.1@2208.72,2147.56 pad.1@2208.72,2246.46 ; 2210.68,2213.03 pad.1@2293.04,2213.03 ; pad.1@2437.69,2127.87 pad.1@2437.69,2226.77
  Bottom Layer w50: P2.6@3035.68,2144.26 ccw(c2979.27,2200.67) 3059.04,2200.67 ; P2.9@3039.21,1938.88 cw(c3039.21,1898.32) 3067.89,1927 ; P2.6@3039.21,2145.73 ccw(c3039.21,2208.53) 3083.62,2164.12 ; P2.6@3059.04,2152.94 P1.2 ; 3088.17,2168.67 cw(c3139.51,2117.34) 3139.51,2189.94 ccw(c3131.99,2137.32) 3094.4,2174.9 ; P2.7 3109.44,2189.94 3040.61,2121.11 3040.61,1954.28 3089.82,1905.06 P2.8@3146.91,1905.06
  other v1: 2599.03,2580.7 2311.4,2636.8 2368.3,2639.4 2425.9,2639.9 2312.2,2705.3 2368.3,2706.3 3140.6,2706.1 2426.4,2707.2 3086.5,2733 3051.3,2749.1 3119,2749.9 2366.9,2762.4 2425,2762.4 2311.7,2762.9 1835.1,2777 2902.8,2878.9 1718,2904.1
GREEN_LED: R12.2 U3.12 | length 254.1
  Top Layer w10: R12.2 2149.56,2420.76 2206.5,2477.7 2206.5,2564.5 U3.12 ; R12.2@2123.96,2415.95 cw(c2135.59,2404.32) 2135.59,2420.76 cw(c2135.59,2437.21) R12.2@2123.96,2425.58
NetB1_2: B1.2 Q2.3 | length 460.9
  Top Layer w20: Q2.3 1803.16,2730.54 v1(1811.1,2722.6) ; Q2.3@1769.26,2725.08 cw(c1782.43,2711.91) 1782.43,2730.54 cw(c1782.43,2749.17) Q2.3@1769.26,2736 ; Q2.3@1777.45,2730.54 cw(c1777.45,2688.95) v1@1806.86,2718.36
  Bottom Layer w20: B1.2@1776.62,2566.67 ccw(c1686.85,2656.43) 1813.8,2656.43 ; B1.2@1790.76,2552.53 ccw(c1735.13,2608.15) 1813.8,2608.15 ; v1@1806.86,2718.36 cw(c1790.1,2701.6) 1813.8,2701.6 ; v1(1811.1,2722.6) 1813.8,2719.9 B1.2@1813.8,2555.4
NetC1_1: C1.1 R2.1 | length 45
  Top Layer w16: R2.1 C1.1@2397,1928.35
NetC3_1: C3.1 R15.1 R16.1 U2.3 | length 204.2
  Top Layer w16: U2.3@2983.17,2673.65 C3.1@2983.17,2863 ; 2983.17,2690.89 ccw(c3002.05,2690.89) U2.3@2988.7,2677.54
NetC4_2: C4.2 R2.2 R3.2 U1.5 | length 250.7
  Top Layer w11.8: R2.2@2347.82,1975.83 ccw(c2336.86,1986.8) 2352.36,1986.8 ; C4.2@2349.17,2010.82 cw(c2341.45,2003.11) 2352.36,2003.11 ; C4.2@2349.17,2019.18 ccw(c2341.45,2026.89) 2352.36,2026.89 ; R3.2@2349.17,2050.82 cw(c2341.45,2043.11) 2352.36,2043.11 ; R3.2@2349.17,2059.18 ccw(c2341.45,2066.89) 2352.36,2066.89 ; R2.2@2352.36,1971.65 U1.5@2352.36,2110.24 ; 2352.36,1985.05 ccw(c2365.4,1985.05) R2.2@2356.18,1975.83 ; 2352.36,1998.35 cw(c2369.99,1998.35) C4.2@2357.53,2010.82 ; 2352.36,2031.65 ccw(c2369.99,2031.65) C4.2@2357.53,2019.18 ; 2352.36,2038.35 cw(c2369.99,2038.35) R3.2@2357.53,2050.82 ; 2352.36,2071.65 ccw(c2369.99,2071.65) R3.2@2357.53,2059.18
NetC15_2: C15.2 R10.2 | length 89.1
  Top Layer w12: C15.2 R10.2 ; C15.2@2254.11,1924.24 cw(c2264.03,1914.32) 2264.03,1928.35 cw(c2264.03,1942.38) C15.2@2254.11,1932.46 ; R10.2@2290.89,1924.24 ccw(c2280.97,1914.32) 2280.97,1928.35 ccw(c2280.97,1942.38) R10.2@2290.89,1932.46
NetC16_1: C16.1 L1.1 U2.6
NetC16_2: C16.2 U2.1 | length 130.3
  Top Layer w15: U2.1@3063.85,2655.47 cw(c3090.72,2628.6) 3090.72,2666.6 ; U2.1@3068.3,2666.6 3126.1,2666.6 3136.6,2656.1 C16.2
NetC17_1: C17.1 R8.1 U1.2 | length 143.5
  Top Layer w11.8: C17.1@2287.47,2019.18 ccw(c2273.39,2033.26) 2293.31,2033.26 ; R8.1@2287.47,2050.82 cw(c2273.39,2036.74) 2293.31,2036.74 ; R8.1@2287.47,2059.18 ccw(c2273.39,2073.26) 2293.31,2073.26 ; C17.1@2293.31,2011.65 U1.2
NetC17_2: C17.2 R8.2 U1.1 | length 149.3
  Top Layer w11.8: C17.2@2244.17,2019.18 ccw(c2234.08,2029.27) 2248.35,2029.27 ccw(c2262.62,2029.27) C17.2@2252.53,2019.18 ; R8.2@2244.17,2050.82 cw(c2234.08,2040.73) 2248.35,2040.73 cw(c2262.62,2040.73) R8.2@2252.53,2050.82 ; C17.2@2248.35,2011.65 2248.35,2056.65 cw(c2280.57,2056.65) 2257.78,2079.44 2265,2086.65 ccw(c2244.18,2107.47) 2273.62,2107.47 U1.1
NetC18_1: C18.1 U3.22 | length 303.8
  Top Layer w10: U3.22 2432.8,2529 2439.2,2522.6 2547.2,2522.6 2564.6,2540 2564.6,2635.2 2575.53,2646.13 C18.1
NetD1_K: D1.K R4.2 | length 98.7
  Top Layer w20: R4.2 2633.9,2402.4 2644.4,2391.9 D1.K ; D1.K@2689.51,2386.03 ccw(c2675.33,2371.84) 2675.33,2391.9 ccw(c2675.33,2411.96) D1.K@2689.51,2397.77
NetD2_4: D2.4 R11.1 | length 273.4
  Top Layer w15: D2.4@1927.8,2565.8 2030.6,2565.8 2063.34,2533.06 R11.1 ; D2.4@1959.73,2555.38 cw(c1984.88,2530.24) 1984.88,2565.8 ; D2.4@1959.73,2572.62 ccw(c1976.19,2589.07) 1976.19,2565.8 ; 2041.54,2554.86 ccw(c2081.38,2594.7) R11.1@2081.38,2538.36 ; 2067.15,2529.25 ccw(c2081.38,2543.48) R11.1@2081.38,2523.36
NetD2_5: D2.5 R13.1 | length 271.1
  Top Layer w15: D2.5@1927.8,2505.6 2036.7,2505.6 2066.24,2476.06 R13.1 ; D2.5@1959.73,2495.38 cw(c1984.39,2470.72) 1984.39,2505.6 ; D2.5@1959.73,2512.62 ccw(c1976.67,2529.55) 1976.67,2505.6 ; 2045.96,2496.34 ccw(c2082.18,2532.55) R13.1@2083.65,2481.36 ; 2070.56,2471.74 ccw(c2083.56,2484.73) R13.1@2084.09,2466.36
NetD2_6: D2.6 R12.1 | length 212.2
  Top Layer w15: D2.6@1927.8,2440.4 2040.9,2440.4 2060.54,2420.76 R12.1 ; D2.6@1959.73,2435.38 cw(c1971.84,2423.27) 1971.84,2440.4 ; D2.6@1959.73,2452.62 ccw(c1989.22,2482.11) 1989.22,2440.4
NetQ2_1: Q2.1 R21.2 R28.2 | length 199.6
  Top Layer w20: R28.2@1790.67,2877.72 cw(c1765.25,2852.3) 1801.2,2852.3 ; R28.2@1792.65,2879.7 R21.2 ; Q2.1@1795.75,2829.5 ccw(c1782.57,2842.67) 1801.2,2842.67 ccw(c1819.83,2842.67) Q2.1@1806.66,2829.5 ; Q2.1 R28.2@1801.2,2877.5
NetR10_1: R10.1 U1.3 | length 166.7
  Top Layer w11.8: R10.1@2295,1977.56 ccw(c2295,2001.49) 2311.92,1984.57 ; R10.1@2299.5,1972.15 2318.76,1991.41 ccw(c2308.51,2001.65) 2323,2001.65 2323,2075 ccw(c2309.34,2075) 2319,2084.65 cw(c2333.5,2099.16) 2312.99,2099.16 U1.3
NetR14_1: R14.1 U2.4 | length 104.9
  Top Layer w16: R14.1@2973.55,2482.89 ccw(c2960.53,2495.92) 2978.95,2495.92 ; R14.1@2978.95,2477.9 U2.4@2978.95,2568.32
NRST: C11.2 R1.1 U3.7 | length 464.2
  Top Layer w10: R1.1@1909.31,2663.78 ccw(c1900.98,2673.17) 1913.53,2673.17 ; R1.1@1911.19,2669.64 cw(c1913.04,2660.57) R1.1@1919.58,2667.12 ; R1.1@1913.19,2659.84 cw(c1917.51,2638.75) 1932.73,2653.97 ; C11.2@1913.53,2717.7 1913.53,2673.17 ; 1915.04,2671.66 cw(c1906.79,2663.41) R1.1@1916.48,2656.91 ; R1.1@1918,2664.07 cw(c1925.03,2673.17) 1913.53,2673.17 ; R1.1@1923.64,2663.06 cw(c1917.08,2656.5) R1.1@1924.79,2651.34 ; U3.7 2119.4,2684.6 2083.7,2648.9 1937.8,2648.9 1913.53,2673.17
PWM_O: P1.3 U3.45 | length 1718.9
  Top Layer w10: U3.45@2314.5,2830.2 2314.57,2871.12 2364.52,2920.9 3074.7,2920.9 v1(3121,2874.6) ; v1@3110,2874.6 ccw(c3083.44,2874.6) 3102.22,2893.38 ccw(c3121,2912.16) v1@3121,2885.6
  Bottom Layer w15: 3095.58,2357.4 cw(c3046.88,2308.7) P1.3@3115.75,2308.7 ; 3111.27,2341.71 ccw(c3137.78,2368.21) P1.3@3137.78,2330.73 ; v1@3121,2866.1 cw(c3121,2845.58) 3135.51,2860.09 cw(c3150.02,2874.6) v1@3129.5,2874.6 ; v1(3121,2874.6) 3180.7,2814.9 3180.7,2681.1 3050.4,2550.8 3050.4,2402.58 P1.3@3137.78,2315.2
PWM_O_1: pad.1@3216.52,2308.7 U3.43 | length 1736.5
  Top Layer w10: U3.43 2354.1,2852.6 2375.9,2874.4 v1@2762.2,2874.4 ; 2708.71,2874.4 cw(c2708.71,2811.31) v1@2753.32,2855.92 ; 2732.85,2874.4 cw(c2732.85,2835.45) v1@2760.39,2862.99
  Bottom Layer w15: v1(2761.1,2863.7) 2761.1,2869.2 2799.3,2907.4 2800.1,2907.4 2805.8,2913.1 3174.1,2913.1 3226.9,2860.3 pad.1@3226.9,2308.7 ; v1@2769.6,2863.7 cw(c2803.4,2863.7) 2779.5,2887.6 ; pad.1@3200.61,2324.61 ccw(c3137.14,2388.08) 3226.9,2388.08 ; pad.1@3211.22,2314 ccw(c3173.36,2351.86) 3226.9,2351.86 ; 3226.9,2337.96 ccw(c3245.78,2337.96) pad.1@3232.43,2324.61
RED_LED: R13.2 U3.11 | length 234.3
  Top Layer w10: R13.2 2147.56,2476.06 2182.1,2510.6 2182.1,2585.5 2202.4,2605.8 U3.11 ; R13.2@2122.06,2471.25 cw(c2133.69,2459.62) 2133.69,2476.06 cw(c2133.69,2492.51) R13.2@2122.06,2480.88
SWCLK: JP2.2 U3.37 | length 627.6
  Top Layer w10: U3.37 2484.7,2842.7 2725.5,2842.7 2784.8,2783.4 2784.8,2757.1 2798.9,2743 2798.9,2650.2 2827.4,2621.7 JP2.2@2849.8,2621.7 ; 2808.45,2640.65 ccw(c2825.1,2657.29) JP2.2@2838.36,2637.84 ; 2816.99,2632.11 ccw(c2832.02,2647.14) JP2.2@2843.99,2629.58 ; 2817.05,2632.05 cw(c2797.71,2612.7) JP2.2@2825.07,2612.7
SWDIO: JP2.3 U3.34 | length 599.6
  Top Layer w10: U3.34 2577.3,2763.3 2602.4,2738.2 2759.7,2738.2 2775.8,2722.1 2775.8,2546.4 2808.7,2513.5 ; JP2.3@2827.4,2501.02 ccw(c2808.7,2493.26) 2808.7,2513.5 ; JP2.3@2827.99,2525.71 cw(c2808.7,2534.84) 2808.7,2513.5 ; JP2.3@2845,2513.5 2808.7,2513.5
USART_RX: JP1.2 U3.31 | length 499.5
  Top Layer w10: U3.31 2638.8,2704.2 2656.6,2686.4 2656.6,2639.1 JP1.2 ; JP1.2@2685.57,2579.7 ccw(c2612.1,2579.7) 2664.05,2631.65 ccw(c2716,2683.6) JP1.2@2716,2610.13 ; JP1.2@2695.57,2579.7 ccw(c2646.24,2579.7) 2681.12,2614.58 ccw(c2716,2649.46) JP1.2@2716,2600.13 ; JP1.2@2718.2,2563.2 JP1.2@2729.2,2563.2
USART_TX: JP1.3 U3.30 | length 591.5
  Top Layer w10: U3.30 2618.4,2684.6 2637.8,2665.2 2637.8,2546 JP1.3@2713.55,2470.25 ; 2643.75,2540.05 ccw(c2715.97,2612.26) JP1.3@2715.99,2510.13 ; 2660.82,2522.98 ccw(c2715.98,2578.14) JP1.3@2716,2500.13 ; 2672.46,2511.34 cw(c2640.82,2479.7) JP1.3@2685.57,2479.7 ; 2677.89,2505.91 ccw(c2715.99,2544.01) JP1.3@2716,2490.13
XTALA: C13.2 R7.1 U3.5 Y1.1 | length 660.6
  Top Layer w10: C13.2@1962.6,2794.43 1992.93,2794.43 2035.8,2837.3 ; C13.2@1969.7,2803.25 ccw(c1990.98,2824.53) 1990.98,2794.43 ; 1999.43,2800.93 cw(c2017.41,2782.95) Y1.1@2027.89,2806.12 ; Y1.1@2009.66,2811.16 cw(c2023.78,2797.03) Y1.1@2032.02,2815.23 ; Y1.1@2016.42,2796.44 cw(c2031.92,2806.94) 2018.68,2820.18 ; Y1.1@2024.7,2802.05 cw(c2042.12,2813.86) 2027.24,2828.74 ; Y1.1@2032.98,2807.66 cw(c2052.33,2820.77) 2035.8,2837.3 ; 2097.27,2838.73 cw(c2042.88,2784.33) R7.1@2119.8,2784.33 ; 2114.35,2821.65 cw(c2077.02,2784.33) R7.1@2129.8,2784.33 ; R7.1 2127.6,2788.69 2137.46,2798.54 ccw(c2145.28,2790.72) R7.1@2134.95,2786.77 ; 2131.42,2804.58 cw(c2111.16,2784.33) R7.1@2139.8,2784.33 ; U3.5 2196.5,2723.9 2183,2737.4 2183,2753 2098.7,2837.3 2035.8,2837.3
XTALB: C14.2 R7.2 U3.6 Y1.3 | length 340
  Top Layer w11: R7.2@2128.58,2744.56 cw(c2128.58,2710.13) 2152.93,2734.47 ; R7.2@2138.9,2748.5 2183.3,2704.1 U3.6@2228.1,2704.1
  Top Layer w12: Y1.3@2064.43,2735.68 cw(c2047.79,2719.04) 2071.32,2719.04 cw(c2094.85,2719.04) Y1.3@2078.21,2735.68 ; C14.2@2071.32,2682.29 Y1.3 2075.28,2748.5 R7.2@2138.9,2748.5 ; Y1.3@2078.21,2739.62 cw(c2099.66,2718.17) 2099.66,2748.5 ; Y1.3@2078.21,2753.4 ccw(c2090.05,2765.24) 2090.05,2748.5
pads on no net: P2.2 P2.3 P2.4 U1.9 U1.21 U3.2 U3.3 U3.4 U3.13 U3.14 U3.16 U3.17 U3.18 U3.19 U3.21 U3.25 U3.26 U3.27 U3.28 U3.29 U3.32 U3.33 U3.38 U3.39 U3.40 U3.41 U3.42 Y1.2 Y1.4

## Polygon pours and split planes (outlines as drawn)
GND on Top Layer "TopLayer-No Net 4" (solid, remove dead copper, pour order 1001): 2952.8,2145.8 3201.6,2145.8 3201.8,2146 3202,2145.8 3202,2124.4 3202,2114.9 3179,2091.9 3178.1,2092.8 3065.4,2092.8 2955.4,2092.8 2952.7,2095.5 2952.8,2095.6 2952.8,2145.8
GND on Top Layer "TopLayer-No Net 4" (solid, remove dead copper, pour order 1000): 1688.9,2944.9 1691.3,2942.5 3265.7,2942.5 3265.7,2087.6 3263.6,2089.7 3020,2089.7 2958.5,2089.7 2952.7,2095.5 2952.8,2095.6 2952.8,2145.4 2952.8,2336.9 2952.2,2337.5 2947.2,2342.5 2208.72,2342.5 2208.72,2357.79 2198,2368.5 2101.3,2368.5 1689.4,2368.5 1688.9,2368 1688.9,2942.7
GND on Bottom Layer "TopLayer-No Net 4" (solid, remove dead copper, pour order 1001): 1688.9,2943.8 3264.4,2943.8 3265.7,2942.5 3265.7,1856.7 1688.9,1856.7 1688.9,2943.8

## Keep-outs
Keep-Out Layer:
  lines w10: 1688.9,2927.8 1688.9,2986.8 ; 1688.9,2932.2 1688.9,1856.7 3265.7,1856.7 3265.7,2942.5 1688.9,2942.5

## Other copper
Top Layer:
  pour cut-out: 2498.2,2830.2 2495.7,2827.7 2495.7,2550 2248.3,2550 2247.5,2549.2 2241.1,2555.6 2241.1,2830.2
  region: 2401.57,2171.26 2417.32,2171.26 2433.07,2157.48 2566.93,2157.48 2566.93,2137.8 2515.75,2137.8 2515.75,2004.92 2797.24,2004.92 2797.24,2247.05 2515.75,2247.05 2515.75,2216.54 2566.93,2216.54 2566.93,2196.85 2433.07,2196.85 2417.32,2183.07 2401.57,2183.07
  region: 2244.09,2190.94 2228.35,2190.94 2212.6,2177.17 2078.74,2177.17 2078.74,2157.48 2129.92,2157.48 2129.92,2024.61 1848.43,2024.61 1848.43,2266.73 2129.92,2266.73 2129.92,2236.22 2078.74,2236.22 2078.74,2216.54 2212.6,2216.54 2228.35,2202.76 2244.09,2202.76
  region net NetC16_1: 3061.2,2587.7 3138.55,2587.7 3140.2,2589.35 3140.9,2588.65 3140.9,2397.9 3096.2,2397.9 3096.2,2515.7 3061.2,2550.7
  region net GND: 3006.5,2774.8 3127,2774.8 3153.5,2748.3 3153.5,2713 3030.8,2713 3006.5,2737.3
  pour cut-out: 3263.5,2686.6 3265.7,2688.8 3265.7,2366.1 3057.42,2366.1 3054.42,2363.1 3052.1,2365.42 3052.1,2682.2 3056.5,2686.6
Bottom Layer:
  rectangle net GND: 2655,2336.39 2937.68,2360
  rectangle net GND: 2339.21,2161.65 2380,2238.89
  rectangle net GND: 2260,2131.65 2306.79,2237.98
  region net GND: 2339.21,2161.65 2342,2145.65 2347.84,2132.56 2369.09,2132.56 2370,2131.65 2380,2141.65 2380,2161.55 2369.89,2171.65 2349.21,2171.65
  region net GND: 2856.1,2779.1 3139.2,2779.1 3139.2,2729.6 3118.9,2709.3 3118.1,2710.1 3035.4,2710.1 3035.4,2712.6 3016.4,2731.6 2856.1,2731.6

## Silkscreen, mask and mechanical layers (free items; w line width, h text height)
Top Overlay:
  circle w15: c1725.35,2652 r20.75
  circle w15: c1999.86,2807.1 r1.78
  circle w15: c3090.18,2682.8 r13.12
  circle w20: c2190.34,2832.8 r19.16
  lines w10: 2971.7,2006.6 3089.5,2006.6 ; 2971.9,2030.4 3088.4,2030.4 ; 2972.8,2054 3086.3,2054 ; 2973.2,2077.9 3084.7,2077.9 ; 3137.6,2847.9 3173.41,2847.9
  text "GND" at 2657.9,2676.3 h35 r90
  text "GND" at 2938.4,2664.2 h35 r90
  text "CLK" at 2937.5,2591.2 h35 r90
  text "RX" at 2658.8,2583.5 h35 r90
  text "DIO" at 2937.9,2495 h35 r90
  text "TX" at 2658.4,2468.1 h35 r90
  text "V" at 2977.2,2344.6 h30
  text "O" at 3130.4,2344.6 h30
  text "O1" at 3197.1,2344.6 h30
  text "G" at 3054.7,2342.8 h30
  text "3.3V" at 2819.7,2332.4 h35
  text "LD-ShouShi-V1.7-1mm" at 2456.1,2252.1 h60
  text "XBR201-02" at 1755,1955 h30
  text "Phosense" at 2575,1915 h80
Bottom Overlay:
  region: 1773.8,2740.9 2170.2,2740.9 2170.2,2350.9 1862.7,2350.9 1773.8,2439.8
  region: 2982.85,2356.2 2983.25,2355.8 3253.5,2355.8 3253.5,2251.5 2951.15,2251.5 2951.15,2355.5 2951.85,2356.2
Top Solder:
  region: 2433.07,2157.48 2566.93,2157.48 2566.93,2137.8 2515.75,2137.8 2515.75,2004.92 2797.24,2004.92 2797.24,2247.05 2515.75,2247.05 2515.75,2216.54 2566.93,2216.54 2566.93,2196.85 2433.07,2196.85 2433.07,2187.01
  region: 2212.6,2177.17 2078.74,2177.17 2078.74,2157.48 2129.92,2157.48 2129.92,2024.61 1848.43,2024.61 1848.43,2266.73 2129.92,2266.73 2129.92,2236.22 2078.74,2236.22 2078.74,2216.54 2212.6,2216.54 2212.6,2206.69
  lines w23.62: 1720.47,2368.5 2208.72,2368.5 2208.72,2246.46 ; 2208.66,1897.64 2209.03,2147.24 ; 2437.38,1899.21 2437.38,2127.56 ; 2437.69,2226.77 2437.69,2348.82 2925.88,2348.82

## Dimensions
1688.9,2932.2 to 3265.7,2942.5 on Mechanical 1
3265.7,2942.5 to 3265.7,1856.7 on Mechanical 1